# Altium PCB SM3320-BATT-EV.PcbDoc (part 1 of 2)
Units mm, origin at the board's own origin, x right, y up, seen from the top; angles counter-clockwise.
Board outline 204 x 81 mm, 2 copper layers (Top Layer, Bottom Layer), stack 1.662 mm thick; 170 components, 72 nets, 423 pads, 282 vias.
Unrouted connection lines stored in the file: 70.
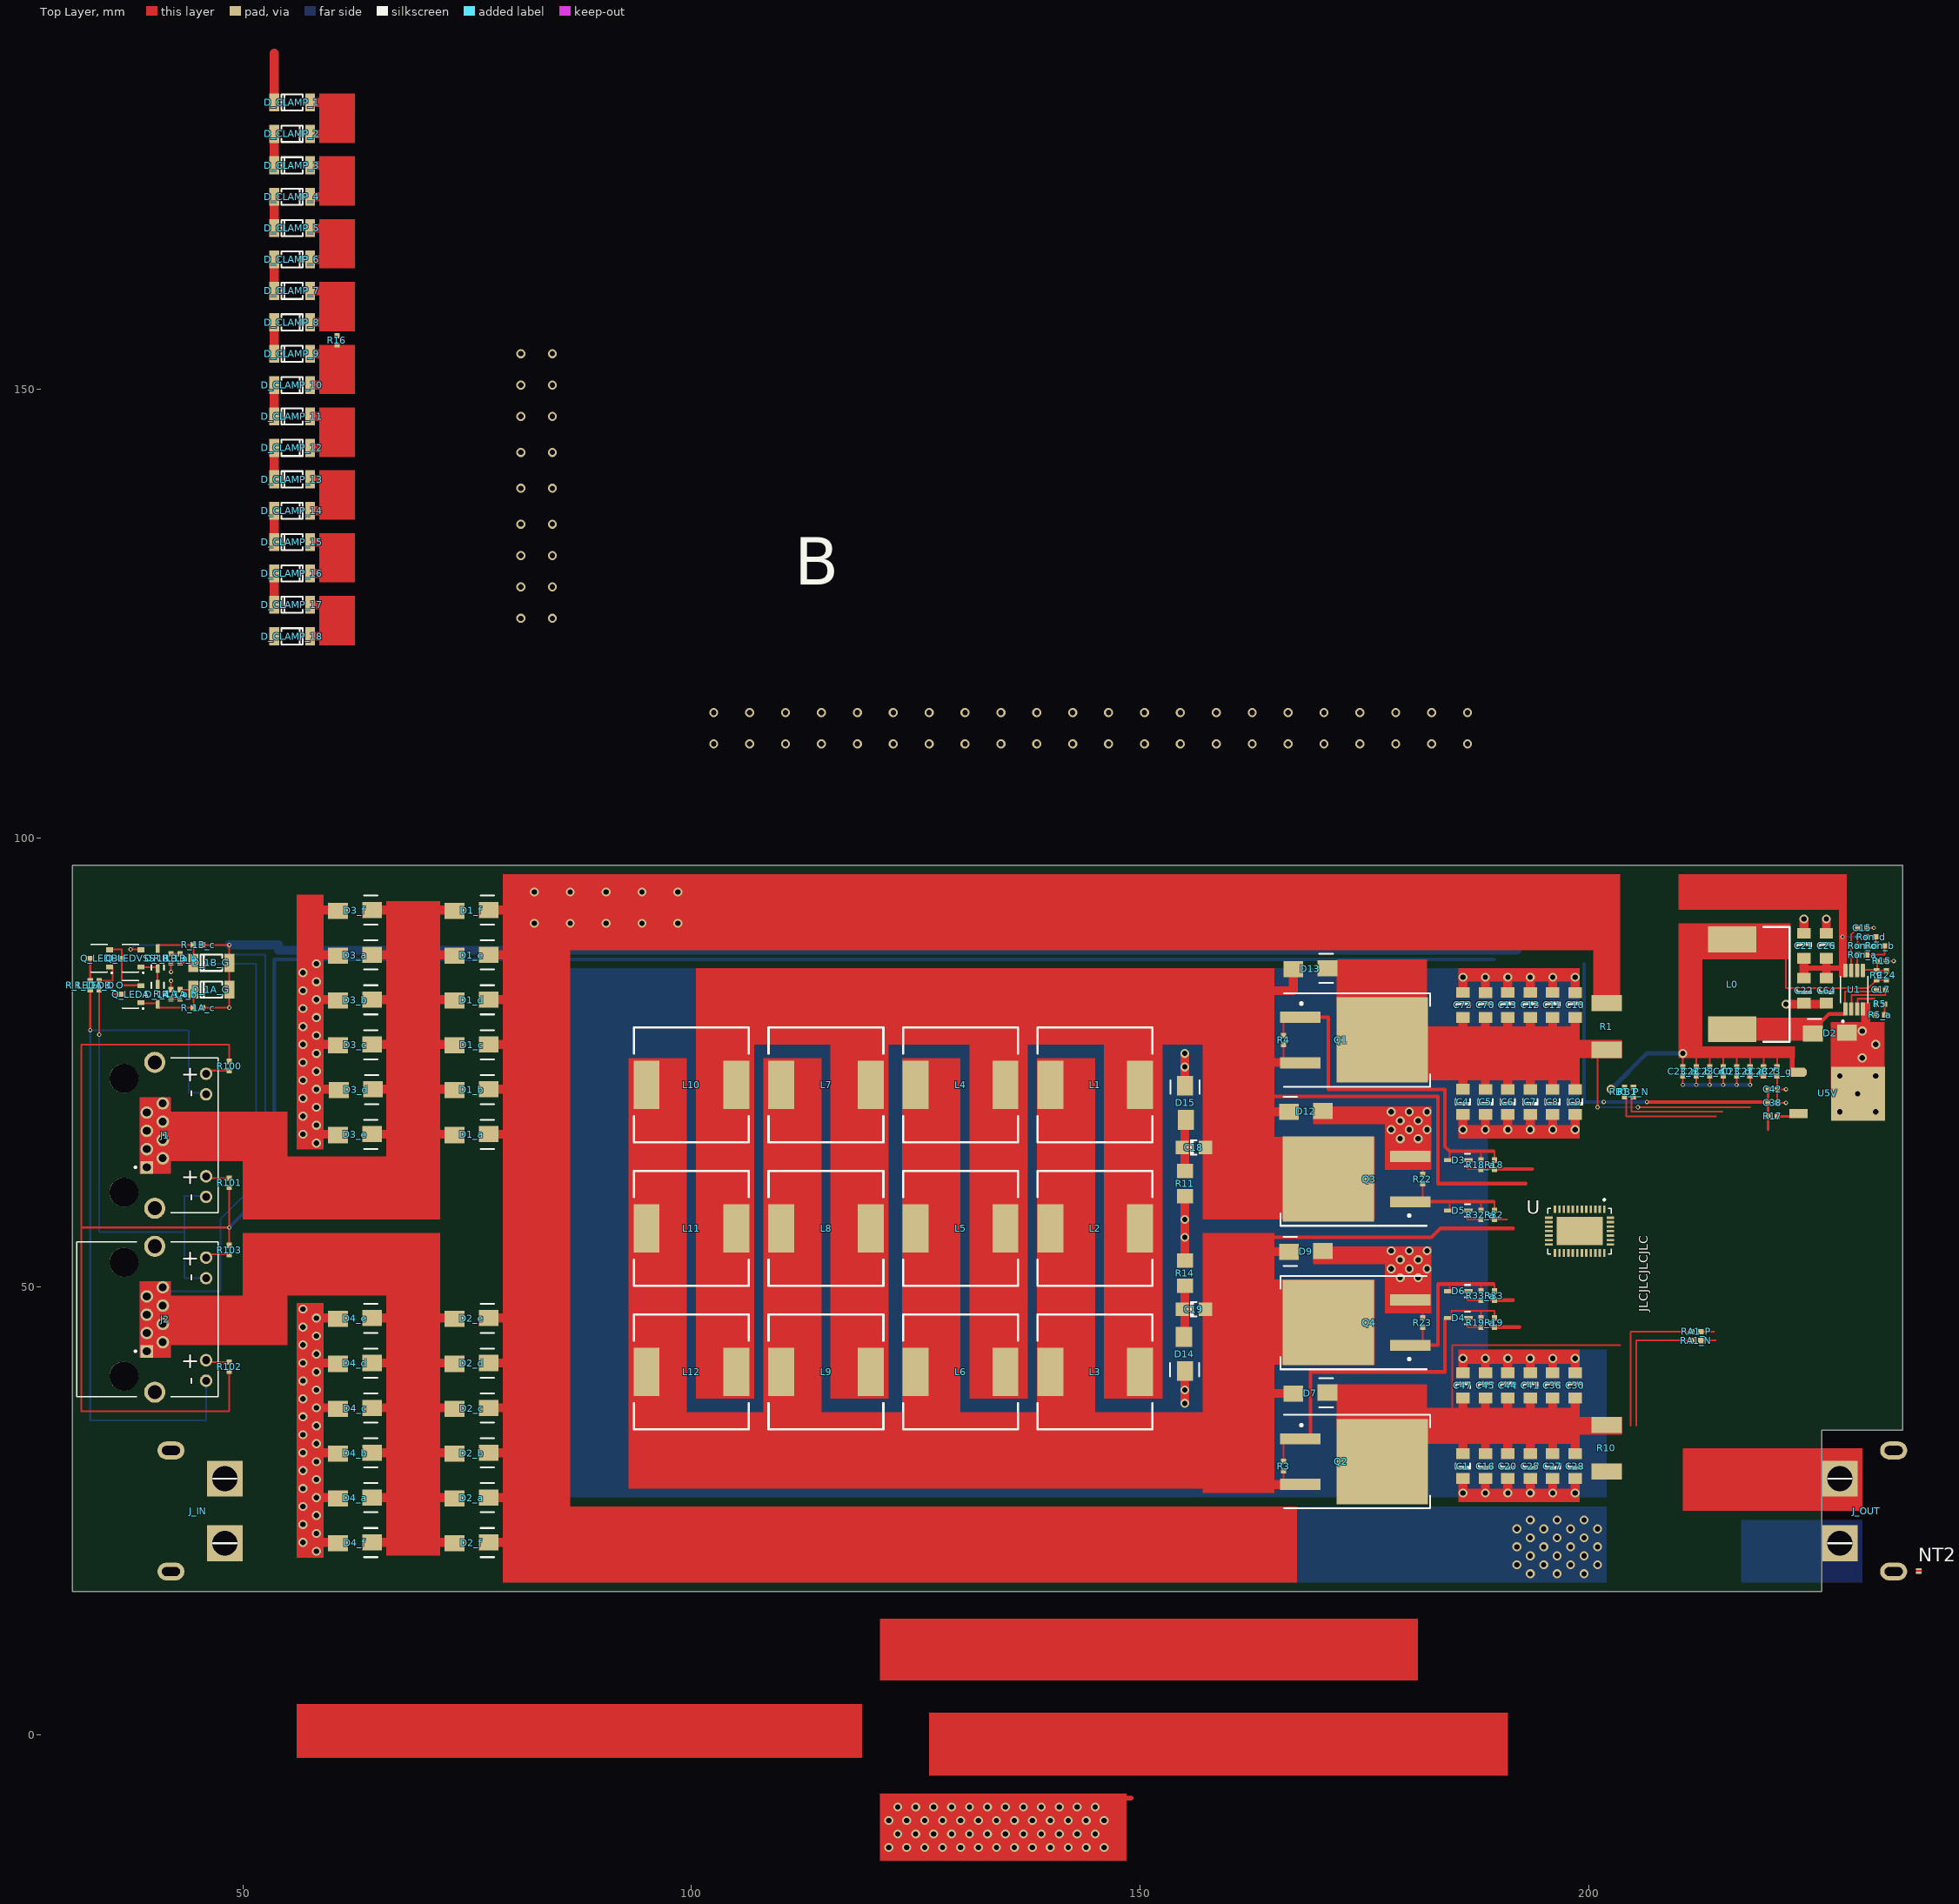
[diagram p0: Top Layer view]
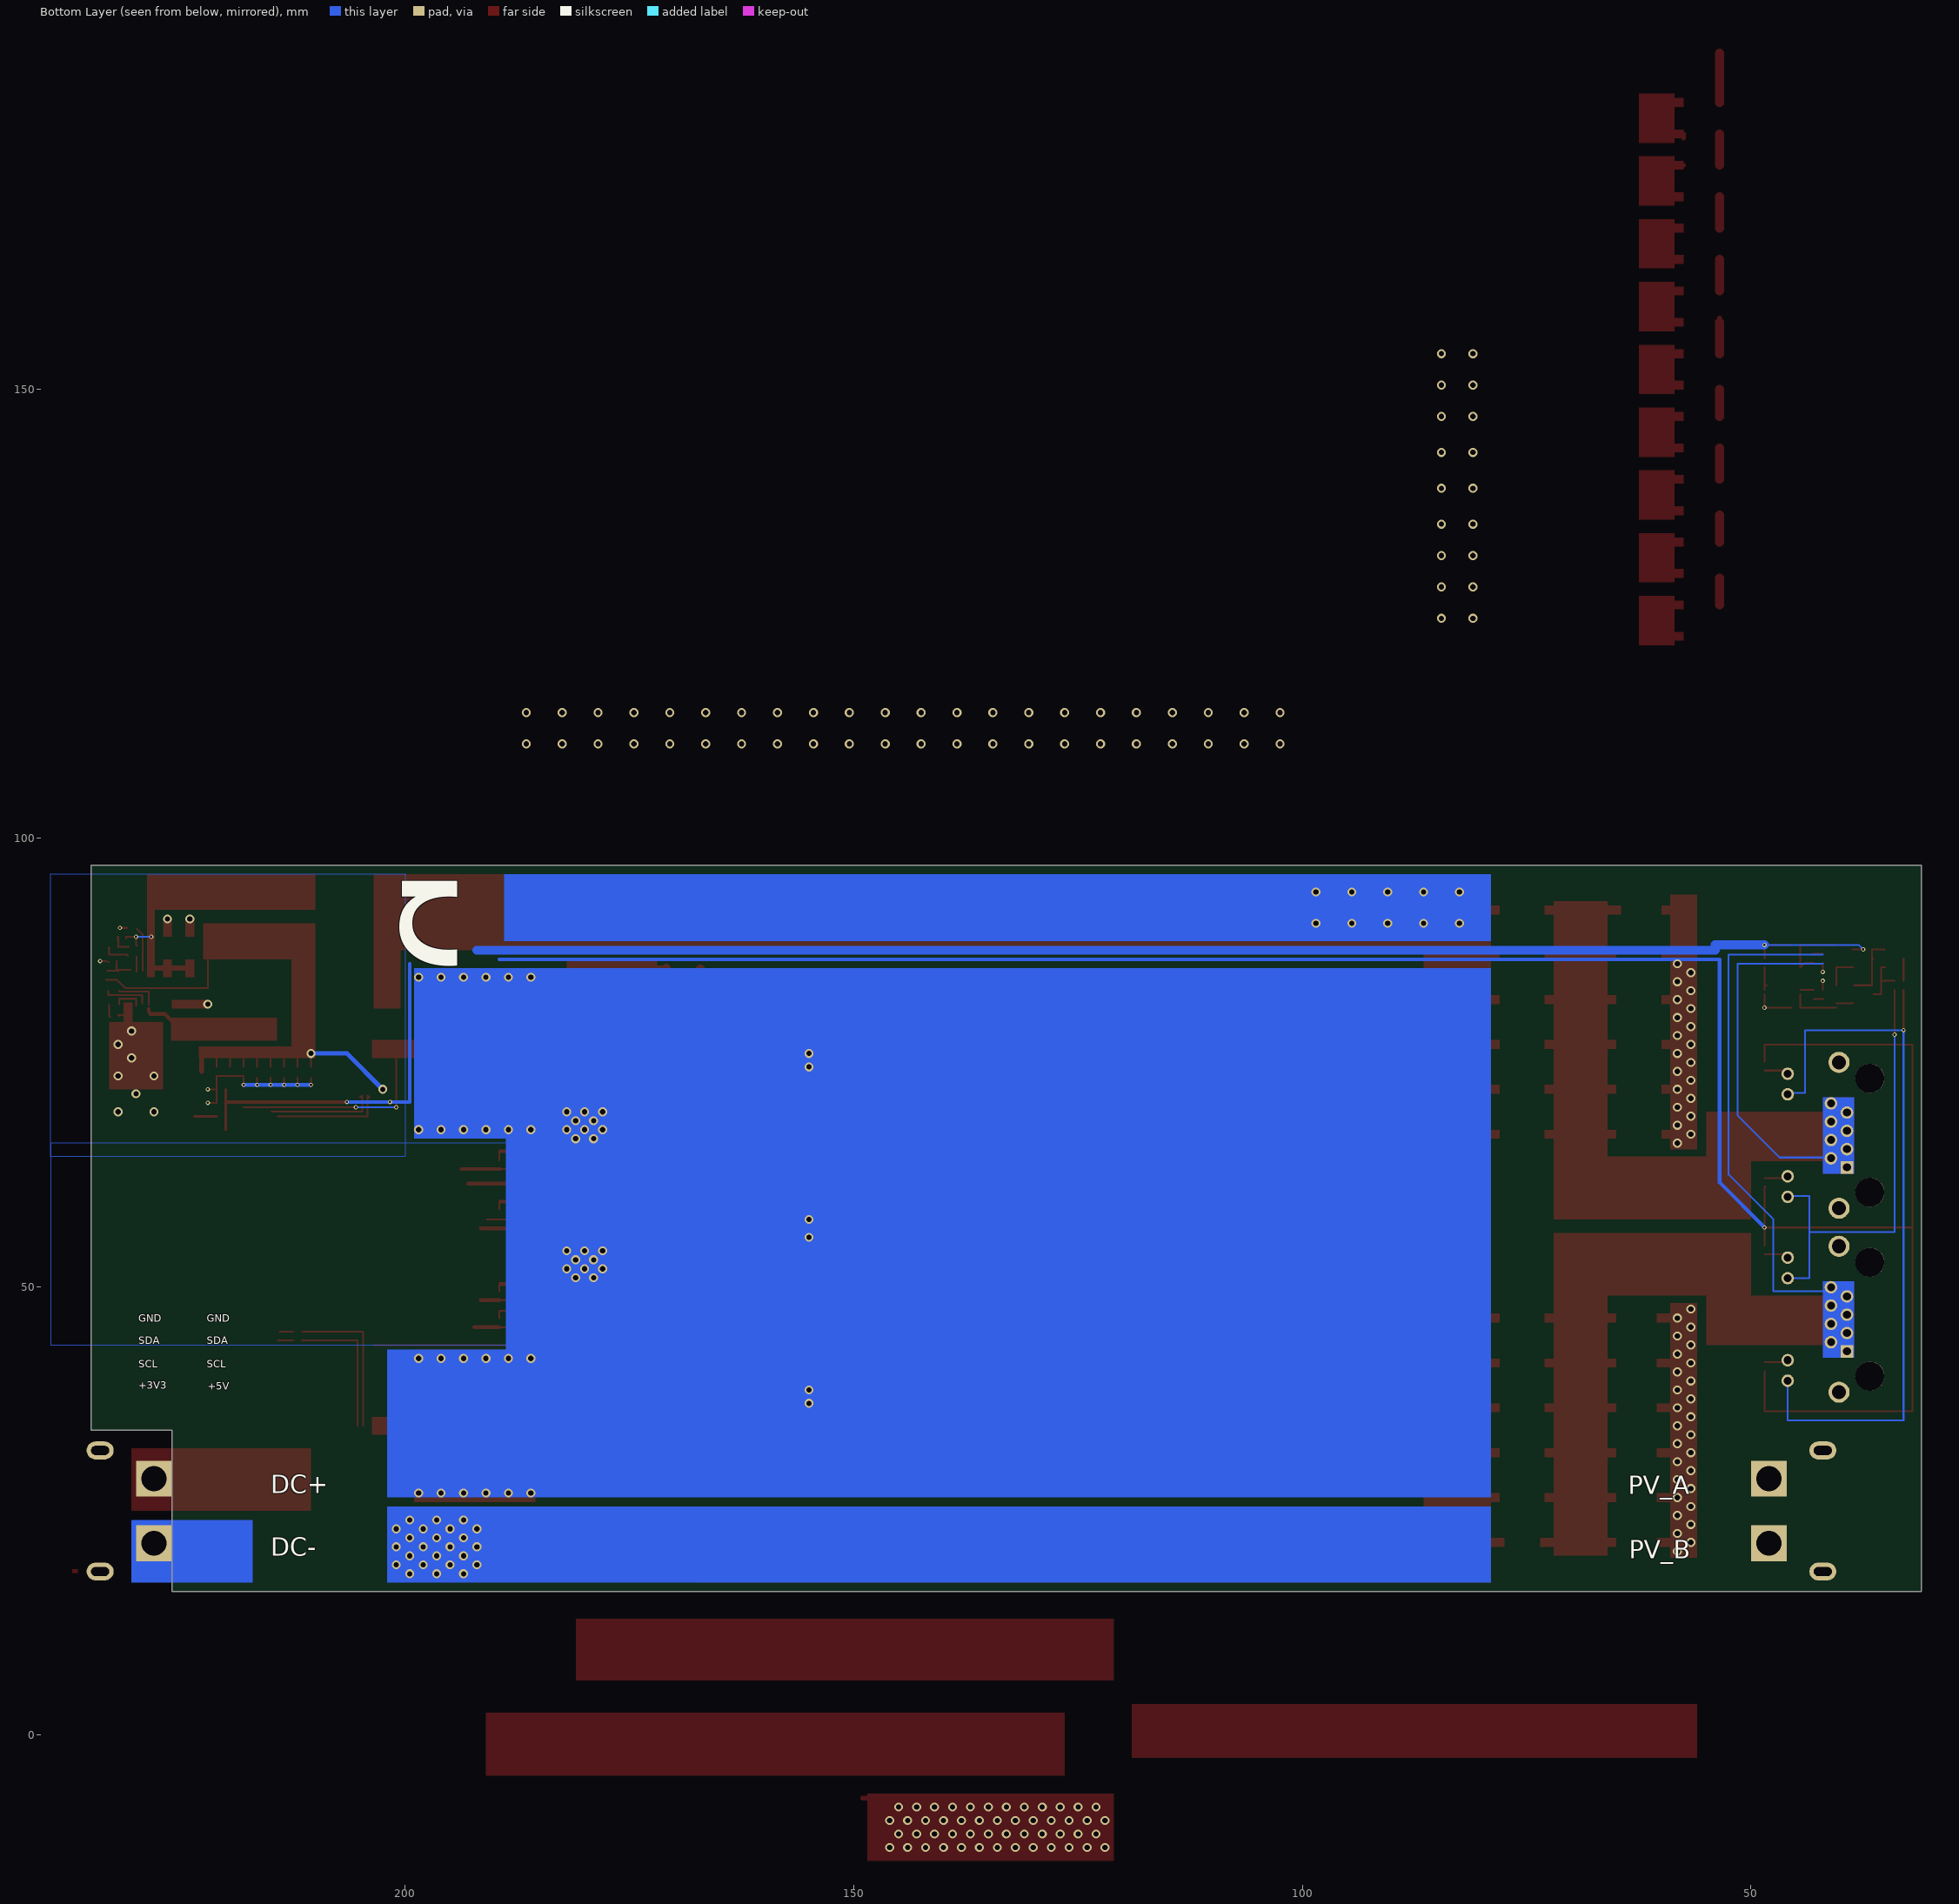
[diagram p1: Bottom Layer view, seen from below]

## Layer stack, top to bottom
Top Solder: solder mask 0.0102, Solder Resist, Dk 3.5
Top Layer: signal copper 0.0711
Dielectric1: core 1.52, FR-4, Dk 4.8
Bottom Layer: signal copper 0.0711
Bottom Solder: solder mask 0.0102, Solder Resist, Dk 3.5

## Board outline
31,16 31,97 235,97.001 235,34 226,34 226,16

## Design rules (kind name [scope] priority, off if disabled: settings)
Clearance Clearance_12 [(IsRegion AND InNet('VIN_D') AND OnLayer('MidLayer4'))] p1: gap=0.61 ignorepadtopadclearanceinfootprint=FALSE except(0: Arc-Hole Track-Hole SMDPad-Hole THPad-Hole Via-Hole Fill-Hole Poly-Hole Region-Hole Text-Hole)
Clearance Clearance_11 [(IsRegion AND InNet('GND') AND OnLayer('MidLayer3'))] p2 off: gap=0.61 ignorepadtopadclearanceinfootprint=FALSE except(0: Arc-Hole Track-Hole SMDPad-Hole THPad-Hole Via-Hole Fill-Hole Poly-Hole Region-Hole Text-Hole)
Clearance Clearance_10 [InNamedPolygon('Top Layer-No Net 15')] p3: gap=0.635 ignorepadtopadclearanceinfootprint=FALSE except(0: Arc-Hole Track-Hole SMDPad-Hole THPad-Hole Via-Hole Fill-Hole Poly-Hole Region-Hole Text-Hole)
Clearance Clearance_8 [InNamedPolygon('Bottom Layer-No Net 5')] p4: gap=0.635 ignorepadtopadclearanceinfootprint=FALSE except(0: Arc-Hole Track-Hole SMDPad-Hole THPad-Hole Via-Hole Fill-Hole Poly-Hole Region-Hole Text-Hole)
Clearance Clearance_6 [InNamedPolygon('MidLayer1-No Net 5')] p5: gap=0.406 ignorepadtopadclearanceinfootprint=FALSE except(0: Arc-Hole Track-Hole SMDPad-Hole THPad-Hole Via-Hole Fill-Hole Poly-Hole Region-Hole Text-Hole)
Clearance Clearance_13 [InNamedPolygon('MidLayer3-No Net 5')] p6: gap=0.406 ignorepadtopadclearanceinfootprint=FALSE except(0: Arc-Hole Track-Hole SMDPad-Hole THPad-Hole Via-Hole Fill-Hole Poly-Hole Region-Hole Text-Hole)
Clearance Clearance_5 [InNamedPolygon('Top Layer-No Net 16')] p7: gap=0.635 ignorepadtopadclearanceinfootprint=FALSE except(0: Arc-Hole Track-Hole SMDPad-Hole THPad-Hole Via-Hole Fill-Hole Poly-Hole Region-Hole Text-Hole)
Clearance Clearance_3 [InNamedPolygon('Top Layer-No Net 17')] p8: gap=0.635 ignorepadtopadclearanceinfootprint=FALSE except(0: Arc-Hole Track-Hole SMDPad-Hole THPad-Hole Via-Hole Fill-Hole Poly-Hole Region-Hole Text-Hole)
Clearance Clearance_1 [InNamedPolygon('Bottom Layer-No Net 5')] p9: gap=0.635 ignorepadtopadclearanceinfootprint=FALSE except(0: Arc-Hole Track-Hole SMDPad-Hole THPad-Hole Via-Hole Fill-Hole Poly-Hole Region-Hole Text-Hole)
Clearance [InNamedPolygon('MidLayer1-No Net 5')] p10: gap=1.016 ignorepadtopadclearanceinfootprint=FALSE except(0: Arc-Hole Track-Hole SMDPad-Hole THPad-Hole Via-Hole Fill-Hole Poly-Hole Region-Hole Text-Hole)
Clearance HV_NETS [InNetClass('HV_NETS')] p11: gap=0.61 ignorepadtopadclearanceinfootprint=FALSE except(0: Arc-Hole Track-Hole SMDPad-Hole THPad-Hole Via-Hole Fill-Hole Poly-Hole Region-Hole Text-Hole)
Clearance Clearance_2 [All] p12: gap=0.254 ignorepadtopadclearanceinfootprint=FALSE except(0: Arc-Hole Track-Hole SMDPad-Hole THPad-Hole Via-Hole Fill-Hole Poly-Hole Region-Hole Text-Hole)
Clearance Clearance_9 [(InComponent('P1')) vs (OnLayer('Keep-Out Layer'))] p13: gap=0 ignorepadtopadclearanceinfootprint=FALSE
Clearance Clearance_7 [InNamedPolygon('Top Layer-No Net 4')] p14: gap=0.241 ignorepadtopadclearanceinfootprint=FALSE except(0: Arc-Hole Track-Hole SMDPad-Hole THPad-Hole Via-Hole Fill-Hole Poly-Hole Region-Hole Text-Hole)
Clearance Clearance_4 [InNamedPolygon('MidLayer1-No Net')] p15: gap=0.241 ignorepadtopadclearanceinfootprint=FALSE except(0: Arc-Hole Track-Hole SMDPad-Hole THPad-Hole Via-Hole Fill-Hole Poly-Hole Region-Hole Text-Hole)
ComponentClearance [All] p1: gap=0.635 collisioncheckmode=3 verticalgap=0.254 showdistances=FALSE
ComponentClearance ComponentClearance_1 [All] p2: gap=0.254 collisioncheckmode=3 verticalgap=0.254 showdistances=FALSE
DiffPairsRouting DiffPairsRouting_1 [All] p2: maxlimit=0.254 minlimit=0.254 mostfreqgap=0.254 toplayer_minwidth=0.381 toplayer_maxwidth=0.381 toplayer_prefwidth=0.381 bottomlayer_minwidth=0.381 bottomlayer_maxwidth=0.381 bottomlayer_prefwidth=0.381 maxuncoupledlength=12.7
FabricationTestPointUsage TestPointUsage [All] p1: valid=0 allowmultiple=FALSE
FabricationTestPointUsage TestPointUsage_1 [All] p2: valid=0 allowmultiple=FALSE
FabricationTestpoint Testpoint [All] p1: side=3 testpointundercomponent=TRUE minsize=1.016 maxsize=2.54 preferedsize=1.524 minholesize=0 maxholesize=1.016 preferedholesize=0.813 testpointgrid=0.025 allowsidetop=TRUE allowsidebottom=TRUE usegrid=TRUE gridtolerance=0
FabricationTestpoint Testpoint_1 [All] p2: side=3 testpointundercomponent=TRUE minsize=1.016 maxsize=2.54 preferedsize=1.524 minholesize=0 maxholesize=1.016 preferedholesize=0.813 testpointgrid=0.025 allowsidetop=TRUE allowsidebottom=TRUE usegrid=TRUE gridtolerance=0
FanoutControl Fanout_LCC [IsLCC] p1: bgadir=Out bgaviamode=Centered fanoutstyle=Auto fanoutdirection=Alternating viagrid=0.025 // Fanout_LCC (Default Rule)
FanoutControl Fanout_BGA [IsBGA] p2: bgadir=Out bgaviamode=Centered fanoutstyle=Auto fanoutdirection=Alternating viagrid=0.025 // Fanout_BGA (Default Rule)
FanoutControl Fanout_Default [All] p4: bgadir=Out bgaviamode=Centered fanoutstyle=Auto fanoutdirection=Alternating viagrid=0.025 // Fanout_Default (Default Rule)
FanoutControl Fanout_Small [(CompPinCount < 5)] p5: bgadir=Out bgaviamode=Centered fanoutstyle=Auto fanoutdirection=OutThenIn viagrid=0.025 // Fanout_Small (Default Rule)
FanoutControl Fanout_BGA_1 [IsBGA] p6: bgadir=Out bgaviamode=Centered fanoutstyle=Auto fanoutdirection=Alternating viagrid=0.025 // Fanout_BGA (Default Rule)
FanoutControl Fanout_LCC_1 [IsLCC] p7: bgadir=Out bgaviamode=Centered fanoutstyle=Auto fanoutdirection=Alternating viagrid=0.025 // Fanout_LCC (Default Rule)
FanoutControl Fanout_SOIC_1 [IsSOIC] p8: bgadir=Out bgaviamode=Centered fanoutstyle=Auto fanoutdirection=Alternating viagrid=0.025 // Fanout_SOIC (Default Rule)
FanoutControl Fanout_Small_1 [(CompPinCount < 5)] p9: bgadir=Out bgaviamode=Centered fanoutstyle=Auto fanoutdirection=OutThenIn viagrid=0.025 // Fanout_Small (Default Rule)
FanoutControl Fanout_Default_1 [All] p10: bgadir=Out bgaviamode=Centered fanoutstyle=Auto fanoutdirection=Alternating viagrid=0.025 // Fanout_Default (Default Rule)
Height Height_1 [All] p2: minheight=0 maxheight=25.4 prefheight=12.7
HoleSize [All] p1: absolutevalues=TRUE maxlimit=6.375 minlimit=0.198 maxpercent=80.000 minpercent=20.000
HoleSize HoleSize_1 [All] p2: absolutevalues=TRUE maxlimit=2.54 minlimit=0.025 maxpercent=80.000 minpercent=20.000
LayerPairs LayerPairs_1 [All] p2: enforce=TRUE
MinimumAnnularRing [All] p1: minimumring=0.203
PasteMaskExpansion PasteMaskExpansion_1 [All] p2: expansion=0
PlaneClearance PlaneClearance_1 [All] p2: clearance=0.508
PlaneConnect [All] p1: planeconnectstyle=Relief reliefexpansion=0.254 reliefentries=4 reliefconductorwidth=0.203 reliefairgap=0.254
PolygonConnect PolygonConnect_12 [All vs IsNamedPolygon('Top Layer-No Net 4') Or  IsNamedPolygon('Top Layer-GND') Or  IsNamedPolygon('Vout') Or  IsNamedPolygon('Top Layer-No Net 4') Or  IsNamedPolygon('Top Layer-No Net 4') Or  IsNamedPolygon('Top Layer-No Net 4') Or  IsNamedPolygon('Top Layer-No Net 4') Or  IsNamedPolygon('Top Layer-No Net 4') Or  IsNamedPolygon('Top Layer-No Net 4') Or  IsNamedPolygon('Top Layer-No Net 4') Or  IsNamedPolygon('Top Layer-No Net 4') Or  IsNamedPolygon('Top Layer-No Net 4') Or  IsNamedPolygon('Top Layer-No Net 4') Or  IsNamedPolygon('Top Layer-No Net 4') Or  IsNamedPolygon('MidLayer1-No Net') Or  IsNamedPolygon('Top Layer-No Net 4') Or  IsNamedPolygon('Top Layer-No Net 4') Or  IsNamedPolygon('Top Layer-No Net 4') Or  IsNamedPolygon('Top Layer-No Net 4') Or  IsNamedPolygon('Top Layer-No Net 4') Or  IsNamedPolygon('Top Layer-No Net 3') Or  IsNamedPolygon('Top Layer-No Net 4') Or  IsNamedPolygon('Top Layer-No Net 4') Or  IsNamedPolygon('Top Layer-No Net 4') Or  IsNamedPolygon('Top Layer-No Net 4') Or  IsNamedPolygon('Top Layer-No Net 3') Or  IsNamedPolygon('Top Layer-No Net 4') Or  IsNamedPolygon('Top Layer-No Net 4') Or  IsNamedPolygon('Top Layer-No Net 1') Or  IsNamedPolygon('Top Layer-No Net 4') Or  IsNamedPolygon('Top Layer-No Net 4') Or  IsNamedPolygon('Top Layer-No Net 4') Or  IsNamedPolygon('Top Layer-No Net 2') Or  IsNamedPolygon('Top Layer-No Net 4') Or  IsNamedPolygon('Top Layer-No Net 4') Or  IsNamedPolygon('Top Layer-No Net 4') Or  IsNamedPolygon('Top Layer-No Net 4') Or  IsNamedPolygon('Top Layer-No Net') Or  IsNamedPolygon('Top Layer-No Net 4')] p1: connectstyle=Direct reliefconductorwidth=0.254 reliefentries=4 polygonreliefangle="90 Angle" airgapwidth=0.254
PolygonConnect PolygonConnect_11 [All vs IsNamedPolygon('Vout') Or  IsNamedPolygon('MidLayer1-No Net')] p2: connectstyle=Direct reliefconductorwidth=0.254 reliefentries=4 polygonreliefangle="90 Angle" airgapwidth=0.254
PolygonConnect PolygonConnect_10 [All vs IsNamedPolygon('Top Layer-No Net 4')] p3: connectstyle=Direct reliefconductorwidth=0.254 reliefentries=4 polygonreliefangle="90 Angle" airgapwidth=0.254
PolygonConnect PolygonConnect_9 [All vs IsNamedPolygon('Top Layer-No Net 4')] p4: connectstyle=Direct reliefconductorwidth=0.254 reliefentries=4 polygonreliefangle="90 Angle" airgapwidth=0.254
PolygonConnect PolygonConnect_8 [All vs IsNamedPolygon('Top Layer-No Net') Or  IsNamedPolygon('MidLayer1-No Net') Or  IsNamedPolygon('Top Layer-No Net 4')] p5: connectstyle=Direct reliefconductorwidth=0.254 reliefentries=4 polygonreliefangle="90 Angle" airgapwidth=0.254
PolygonConnect PolygonConnect_7 [All vs IsNamedPolygon('Top Layer-No Net') Or  IsNamedPolygon('Top Layer-No Net 3') Or  IsNamedPolygon('MidLayer1-No Net')] p6: connectstyle=Direct reliefconductorwidth=0.254 reliefentries=4 polygonreliefangle="90 Angle" airgapwidth=0.254
PolygonConnect PolygonConnect_6 [All vs IsNamedPolygon('Top Layer-No Net 2') Or  IsNamedPolygon('MidLayer1-No Net') Or  IsNamedPolygon('Top Layer-No Net')] p7: connectstyle=Direct reliefconductorwidth=0.254 reliefentries=4 polygonreliefangle="90 Angle" airgapwidth=0.254
PolygonConnect PolygonConnect_5 [All vs IsNamedPolygon('Top Layer-No Net') Or  IsNamedPolygon('Top Layer-No Net 1') Or  IsNamedPolygon('MidLayer1-No Net')] p8: connectstyle=Direct reliefconductorwidth=0.254 reliefentries=4 polygonreliefangle="90 Angle" airgapwidth=0.254
PolygonConnect PolygonConnect_4 [All vs IsNamedPolygon('MidLayer1-No Net') Or  IsNamedPolygon('Top Layer-No Net')] p9: connectstyle=Direct reliefconductorwidth=0.254 reliefentries=4 polygonreliefangle="90 Angle" airgapwidth=0.254
PolygonConnect PolygonConnect_3 [All vs IsNamedPolygon('Top Layer-No Net') Or  IsNamedPolygon('Top Layer-GND')] p10: connectstyle=Direct reliefconductorwidth=0.254 reliefentries=4 polygonreliefangle="90 Angle" airgapwidth=0.254
PolygonConnect PolygonConnect_2 [All vs IsNamedPolygon('Top Layer-No Net')] p11: connectstyle=Direct reliefconductorwidth=0.254 reliefentries=4 polygonreliefangle="90 Angle" airgapwidth=0.254
PolygonConnect [All] p12: connectstyle=Direct reliefconductorwidth=0.203 reliefentries=4 polygonreliefangle="90 Angle" airgapwidth=0.254
PolygonConnect PolygonConnect_1 [All] p13: connectstyle=Direct reliefconductorwidth=0.254 reliefentries=4 polygonreliefangle="90 Angle" airgapwidth=0.254
RoutingPriority RoutingPriority_1 [All] p2: routingpriority=0
RoutingTopology RoutingTopology_1 [All] p2: topology=Shortest
RoutingVias [All] p1: holewidth=0.406 width=0.813 viastyle="Through Hole" minholewidth=0.254 minwidth=0.635 maxholewidth=0.508 maxwidth=1.016
ShortCircuit ShortCircuit_1 [All] p2: allowed=FALSE
SilkToSolderMaskClearance SilkscreenOverComponentPads [IsPad] p1: minsilkscreentomaskgap=0.127 clearancetoexposedcopper=TRUE
SolderMaskExpansion SolderMaskExpansion_2 [(IsVia And (HoleDiameter  < 15))] p1: expansion=-0.356
SolderMaskExpansion [All] p2: expansion=0.051
SolderMaskExpansion SolderMaskExpansion_1 [All] p3: expansion=0.051
UnRoutedNet UnRoutedNet_1 [All] p2:
Width [All] p1: maxlimit=2.54 minlimit=0.152 preferedwidth=0.254
20 further rules are at their usual default settings.

## Components (designator, comment, footprint, x,y, rotation, side; value= is the part's Value field where it differs from the comment)
C1 "1206B105K101NT" C_1206#1 186.003,30.005 r90 top value=1uF
C4 "1206B105K101NT" C_1206#1 186.003,70.605 r90 top value=1uF
C5 "1206B105K101NT" C_1206#1 188.5,70.6 r90 top value=1uF
C6 "1206B105K101NT" C_1206#1 191,70.6 r90 top value=1uF
C7 "1206B105K101NT" C_1206#1 193.5,70.6 r90 top value=1uF
C8 "1206B105K101NT" C_1206#1 196,70.6 r90 top value=1uF
C9 "1206B105K101NT" C_1206#1 198.5,70.6 r90 top value=1uF
C10 "1206B105K101NT" C_1206#1 198.497,81.395 r270 top value=1uF
C11 "1206B105K101NT" C_1206#1 196,81.4 r270 top value=1uF
C12 "1206B105K101NT" C_1206#1 193.5,81.4 r270 top value=1uF
C13 "1206B105K101NT" C_1206#1 191,81.4 r270 top value=1uF
C15 "CL05A105KA5NQNC" C_0402 230.5,90 r0 top value=1uF
C16 "1206B105K101NT" C_1206#1 188.503,30.005 r90 top value=1uF
C17 "CL05B103KB5NNNC" C_0402 232.6,83.1 r180 top value=10nF
C18 "1206B102K202NT" C_1206#2 156,65.5 r0 top value=1nF
C19 "1206B102K202NT" C_1206#2 156,47.5 r0 top value=1nF
C20 "1206B105K101NT" C_1206#1 191.003,30.005 r90 top value=1uF
C21 "1206B105K101NT" C_1206#1 224,88 r270 top value=1uF
C22 "1206B105K101NT" C_1206#1 224,83 r90 top value=1uF
C23_a "CL05A105KA5NQNC" C_0402 210.5,74 r270 top value=1uF
C23_b "CL05A105KA5NQNC" C_0402 212,74 r270 top value=1uF
C23_c "CL05A105KA5NQNC" C_0402 213.5,74 r270 top value=1uF
C23_d "CL05A105KA5NQNC" C_0402 216.5,74 r270 top value=1uF
C23_e "CL05A105KA5NQNC" C_0402 218,74 r270 top value=1uF
C23_f "CL05A105KA5NQNC" C_0402 219.5,74 r270 top value=1uF
C23_g "CL05A105KA5NQNC" C_0402 221,74 r270 top value=1uF
C24 "CL05B332KB5NNNC" C_0402 233.2,84.7 r270 top value=3.3nF
C25 "1206B105K101NT" C_1206#1 193.503,30.005 r90 top value=1uF
C26 "1206B105K101NT" C_1206#1 226.5,88 r270 top value=1uF
C27 "1206B105K101NT" C_1206#1 196.003,30.005 r90 top value=1uF
C28 "1206B105K101NT" C_1206#1 198.503,30.005 r90 top value=1uF
C30 "1206B105K101NT" C_1206#1 198.5,39 r270 top value=1uF
C36 "1206B105K101NT" C_1206#1 195.997,38.995 r270 top value=1uF
C38 "CL05A106MQ5NUNC" C_0402 220.5,70.5 r180 top value=10uF
C40 "CL05A105KA5NQNC" C_0402 215,74 r90 top value=1uF
C41 "1206B105K101NT" C_1206#1 193.497,38.995 r270 top value=1uF
C42 "CL05A106MQ5NUNC" C_0402 220.5,72 r180 top value=10uF
C44 "1206B105K101NT" C_1206#1 190.997,38.995 r270 top value=1uF
C45 "1206B105K101NT" C_1206#1 188.497,38.995 r270 top value=1uF
C47 "1206B105K101NT" C_1206#1 185.997,38.995 r270 top value=1uF
C64 "1206B105K101NT" C_1206#1 226.5,83 r90 top value=1uF
C70 "1206B105K101NT" C_1206#1 188.497,81.395 r270 top value=1uF
C72 "1206B105K101NT" C_1206#1 186,81.4 r270 top value=1uF
D1_a "SS210" DO-214AC 75.5,67 r180 top
D1_b "SS210" DO-214AC 75.5,72 r180 top
D1_c "SS210" DO-214AC 75.5,77 r180 top
D1_d "SS210" DO-214AC 75.5,82 r180 top
D1_e "SS210" DO-214AC 75.5,87 r180 top
D1_f "SS210" DO-214AC 75.5,92 r180 top
D2 "SS210" DO-214AC 226.9,78.2 r0 top
D2_a "SS210" DO-214AC 75.5,26.5 r180 top
D2_b "SS210" DO-214AC 75.5,31.5 r180 top
D2_c "SS210" DO-214AC 75.5,36.5 r180 top
D2_d "SS210" DO-214AC 75.5,41.5 r180 top
D2_e "SS210" DO-214AC 75.5,46.5 r180 top
D2_f "SS210" DO-214AC 75.5,21.5 r180 top
D3 "N4148WS" SOD-323 185.5,64.1 r180 top
D3_a "SS210" DO-214AC 62.5,87 r180 top
D3_b "SS210" DO-214AC 62.5,82 r180 top
D3_c "SS210" DO-214AC 62.5,77 r180 top
D3_d "SS210" DO-214AC 62.6,72 r180 top
D3_e "SS210" DO-214AC 62.5,67 r180 top
D3_f "SS210" DO-214AC 62.5,92 r180 top
D4 "N4148WS" SOD-323 185.5,46.5 r180 top
D4_a "SS210" DO-214AC 62.5,26.5 r180 top
D4_b "SS210" DO-214AC 62.5,31.5 r180 top
D4_c "SS210" DO-214AC 62.5,36.5 r180 top
D4_d "SS210" DO-214AC 62.5,41.5 r180 top
D4_e "SS210" DO-214AC 62.5,46.5 r180 top
D4_f "SS210" DO-214AC 62.5,21.5 r180 top
D5 "N4148WS" SOD-323 185.5,58.5 r180 top
D6 "N4148WS" SOD-323 185.5,49.5 r180 top
D7 "SS210" DO-214AC 169,38.2 r180 top
D9 "SS210" DO-214AC 168.5,53.9 r0 top
D12 "SS210" DO-214AC 168.5,69.5 r0 top
D13 "SS210" DO-214AC 169,85.5 r180 top
D14 "SS210" DO-214AC 155,42.5 r90 top
D15 "SS210" DO-214AC 155,70.5 r270 top
D_1A "N4148WS" SOD-323 40.5,82.6 r270 top
D_1A_G "ZMM5V6-M" DO-213AA 46.5,83.1 r0 top
D_1B "N4148WS" SOD-323 40.5,86.6 r90 top
D_1B_G "ZMM5V6-M" DO-213AA 46.5,86.1 r0 top
D_CLAMP_1 "ZMM5V6-M" DO-213AA 55.5,182 r0 top
D_CLAMP_2 "ZMM5V6-M" DO-213AA 55.5,178.5 r180 top
D_CLAMP_3 "ZMM5V6-M" DO-213AA 55.5,175 r0 top
D_CLAMP_4 "ZMM5V6-M" DO-213AA 55.5,171.5 r180 top
D_CLAMP_5 "ZMM5V6-M" DO-213AA 55.5,168 r0 top
D_CLAMP_6 "ZMM5V6-M" DO-213AA 55.5,164.5 r180 top
D_CLAMP_7 "ZMM5V6-M" DO-213AA 55.5,161 r0 top
D_CLAMP_8 "ZMM5V6-M" DO-213AA 55.5,157.5 r180 top
D_CLAMP_9 "ZMM5V6-M" DO-213AA 55.5,154 r0 top
D_CLAMP_10 "ZMM5V6-M" DO-213AA 55.5,150.5 r180 top
D_CLAMP_11 "ZMM5V6-M" DO-213AA 55.5,147 r0 top
D_CLAMP_12 "ZMM5V6-M" DO-213AA 55.5,143.5 r180 top
D_CLAMP_13 "ZMM5V6-M" DO-213AA 55.5,140 r0 top
D_CLAMP_14 "ZMM5V6-M" DO-213AA 55.5,136.5 r180 top
D_CLAMP_15 "ZMM5V6-M" DO-213AA 55.5,133 r0 top
D_CLAMP_16 "ZMM5V6-M" DO-213AA 55.5,129.5 r180 top
D_CLAMP_17 "ZMM5V6-M" DO-213AA 55.5,126 r0 top
D_CLAMP_18 "ZMM5V6-M" DO-213AA 55.5,122.5 r180 top
J1 "2-406549-1" TE_2-406549-1 39.305,63.297 r270 top
J2 "2-406549-1" TE_2-406549-1 39.305,42.797 r270 top
J_IN "XT60PW_M" XT60PW_M 48,25 r90 top
J_OUT "XT60PW_F" XT60PW_F 228,25 r270 top
L0 "SWRB1207S-221MT" SRR1260 216,83.7 r90 top value=220uH
L1 "SWRB1207S-221MT" SRR1260 145,72.5 r180 top value=220uH
L2 "SWRB1207S-221MT" SRR1260 145,56.5 r180 top value=220uH
L3 "SWRB1207S-221MT" SRR1260 145,40.5 r180 top value=220uH
L4 "SWRB1207S-221MT" SRR1260 130,72.5 r180 top value=220uH
L5 "SWRB1207S-221MT" SRR1260 130,56.5 r180 top value=220uH
L6 "SWRB1207S-221MT" SRR1260 130,40.5 r180 top value=220uH
L7 "SWRB1207S-221MT" SRR1260 115,72.5 r180 top value=220uH
L8 "SWRB1207S-221MT" SRR1260 115,56.5 r180 top value=220uH
L9 "SWRB1207S-221MT" SRR1260 115,40.5 r180 top value=220uH
L10 "SWRB1207S-221MT" SRR1260 100,72.5 r180 top value=220uH
L11 "SWRB1207S-221MT" SRR1260 100,56.5 r180 top value=220uH
L12 "SWRB1207S-221MT" SRR1260 100,40.5 r180 top value=220uH
NT2 "0" NET_TIE 236.803,18.305 r90 top
Q1 "IRF9540NSTRLPBF" TO-263-3 174.079,77.5 r0 top
Q2 "IRF9540NSTRLPBF" TO-263-3 174.079,30.5 r0 top
Q3 "IRF9540NSTRLPBF" TO-263-3 173.921,62 r180 top
Q4 "IRF9540NSTRLPBF" TO-263-3 173.921,46 r180 top
Q_LEDA "2N7002" TO-236AB 37.5,82.6 r180 top
Q_LEDB "2N7002" TO-236AB 34,86.6 r180 top
Q_LEDVSS "2N7002" TO-236AB 37.5,86.6 r180 top
R1 "1m" R_2512 202,79 r90 top
R3 "0402WGF1002TCE" R_0402 166,30 r270 top value=10k
R4 "0402WGF1002TCE" R_0402 166,77.5 r90 top value=10k
R5 "0402WGF3302TCE" R_0402 232.5,81.5 r180 top value=33k
R5_a "0402WGF1003TCE" R_0402 232.5,80.3 r0 top value=100k
R9 "0402WGF1002TCE" R_0402 232.1,84.7 r90 top value=10k
R10 "1m" R_2512 202,32 r270 top
R11 "1206W4F100JT5E" R_1206 155,61.5 r90 top value=10R
R14 "1206W4F100JT5E" R_1206 155,51.5 r270 top value=10R
R15 "0402WGF3301TCE" R_0402 232.7,86.3 r180 top value=3.3k
R16 "0402WGF0000TCE" R_0402 60.5,155.5 r90 top value=0R
R17 "0402WGF0000TCE" R_0402 220.5,69 r180 top value=0R
R18 "0402WGF100JTCE" R_0402 189.5,63.6 r90 top value=10R
R18_a "0402WGF100JTCE" R_0402 188,63.6 r90 top value=10R
R19 "0402WGF100JTCE" R_0402 189.5,46 r270 top value=10R
R19_a "0402WGF100JTCE" R_0402 188,46 r270 top value=10R
R22 "0402WGF1002TCE" R_0402 181.5,62 r270 top value=10k
R23 "0402WGF1002TCE" R_0402 181.5,46 r90 top value=10k
R32 "0402WGF100JTCE" R_0402 189.5,58 r90 top value=10R
R32_a "0402WGF100JTCE" R_0402 188,58 r90 top value=10R
R33 "0402WGF100JTCE" R_0402 189.5,49.008 r270 top value=10R
R33_a "0402WGF100JTCE" R_0402 188,49.008 r270 top value=10R
R100 "0402WGF1001TCE" R_0402 48.5,74.6 r270 top value=1k
R101 "0402WGF1001TCE" R_0402 48.5,61.6 r90 top value=1k
R102 "0402WGF1001TCE" R_0402 48.5,41.1 r90 top value=1k
R103 "0402WGF1001TCE" R_0402 48.5,54.1 r270 top value=1k
R_1A_a "0402WGF4702TCE" R_0402 42,82.608 r270 top value=47k
R_1A_b "0402WGF4702TCE" R_0402 43,82.6 r90 top value=47k
R_1A_c "0402WGF1003TCE" R_0402 45,81.1 r180 top value=100k
R_1B_a "0402WGF4702TCE" R_0402 42,86.6 r90 top value=47k
R_1B_b "0402WGF4702TCE" R_0402 43,86.6 r270 top value=47k
R_1B_c "0402WGF1003TCE" R_0402 45,88.1 r180 top value=100k
R_LEDA_O "0402WGF0000TCE" R_0402 33,83.6 r270 top value=0R
R_LEDB_O "0402WGF0000TCE" R_0402 34,83.6 r270 top value=0R
RA1_N "0402WGF0000TCE" R_0402 212,44 r0 top value=0R
RA1_P "0402WGF0000TCE" R_0402 212,45 r0 top value=0R
RB1_N "0402WGF0000TCE" R_0402 205,71.7 r270 top value=0R
RB1_P "0402WGF0000TCE" R_0402 204,71.7 r270 top value=0R
Ron_a "0402WGF1003TCE" R_0402 230.5,87 r180 top value=100k
Ron_b "0402WGF1003TCE" R_0402 232.5,88 r180 top value=100k
Ron_c "0402WGF1003TCE" R_0402 230.5,88 r0 top value=100k
Ron_d "0402WGF1003TCE" R_0402 231.5,89 r0 top value=100k
U "LT8705IUHF#TRPBF" QFN-39-P0.5MM 199,56.2 r270 top
U1 "LM5008MMX/NOPB" SOP65P490X110-8N 229.6,83.1 r90 top
U5V "L78M05ABDT-TR" TO-252AA 230.05,71.5 r0 top

## Footprints (in the part's own frame and the unit in brackets; to place one, negate y for a bottom-side part, rotate by r counter-clockwise, add the part's x,y. Pads: shape width x height; smd on the part's side, far side on the other; paste and mask are expansions set on the pad)
C_0402 [mm] "Chip Capacitor; Body 1.0 x 0.5 mm (LxW typ)"
  rect 0.6x0.6 smd: 1(-0.508,0) 2(0.508,0)
  body extent -0.5,-0.3 0.5,0.3, height 0.2
C_1206#1 [mm] "Chip Capacitor; Body 3.2 x 1.6 mm (LxW typ)"
  rect 1.2x1.5 smd: 1(-1.395,0) 2(1.395,0)
  silkscreen extent -0.3,-0.8 0.3,0.8, body extent -1.6,-0.8 1.6,0.8, height 1
C_1206#2 [mm] "Chip Capacitor; Body 3.2 x 1.6 mm (LxW typ)"
  rect 1.5x1.5 smd: 1(-1.295,0) 2(1.295,0)
  silkscreen extent -0.3,-0.8 0.3,0.8, body extent -1.6,-0.8 1.6,0.8, height 1
DO-213AA [mm] "2 Leads"
  rect 1.1x2 smd: 1(-2,0) 2(2,0)
  silkscreen extent -1.2,-0.9 1.2,0.9, body extent -1.85,-0.8 1.85,0.8, height 1.61
DO-214AC [mm] "SMA Diode"
  rect 2.2x1.8 smd: 1(-1.9,0) 2(1.9,0.1)
  silkscreen extent -2.5,-1.6 -1,1.65, body extent -2.8,-1.48 2.8,1.47, height 2.9
NET_TIE [mm] "Body 1.0 x 0.5 mm (LxW typ)"
  rect 0.2x0.6 smd: 1(-0.2,0)
  rect 0.2x0.6 smd mask+0.102: 2(0.2,0)
  Top Layer region: -0.2,-0.3 0.2,-0.3 0.2,0.3 -0.2,0.3
QFN-39-P0.5MM [mm]
  rrect25% 0.86x0.27 smd: 1(-2.435,2.75) 2(-2.435,2.25) 3(-2.435,1.75) 4(-2.435,1.25) 5(-2.435,0.75) 6(-2.435,0.25) 7(-2.435,-0.25) 8(-2.435,-0.75) 9(-2.435,-1.25) 10(-2.435,-1.75) 11(-2.435,-2.25) 12(-2.435,-2.75) 20(2.435,-2.75) 21(2.435,-2.25) 22(2.435,-1.75) 23(2.435,-1.25) 24(2.435,-0.75) 25(2.435,-0.25) 26(2.435,0.25) 27(2.435,0.75) 28(2.435,1.25) 29(2.435,1.75) 30(2.435,2.25) 31(2.435,2.75)
  rrect25% 0.27x0.86 smd: 13(-1.5,-3.435) 14(-1,-3.435) 15(-0.5,-3.435) 16(0,-3.435) 17(0.5,-3.435) 18(1,-3.435) 19(1.5,-3.435) 32(1.5,3.435) 33(1,3.435) 34(0.5,3.435) 35(0,3.435) 36(-0.5,3.435) 37(-1,3.435) 38(-1.5,3.435)
  rect 3.15x5.15 smd paste-4: 39(0,0)
  silkscreen extent -3.59,-3.55 2.55,3.55
R_0402 [mm] "Body 1.0 x 0.5 mm (LxW typ)"
  rect 0.6x0.6 smd: 1(-0.508,0) 2(0.508,0)
  body extent -0.5,-0.25 0.5,0.25, height 0.35
R_1206 [mm] "Body 3.2 x 1.6 mm (LxW typ)"
  rect 1.6x1.8 smd: 1(-1.4,0) 2(1.4,0)
  body extent -1.91,-0.76 1.91,0.76, height 1
R_2512 [mm] "VISHAY SHUNT RESISTOR"
  rect 1.8x3.4 smd: 1(-2.6,0) 2(2.6,0)
  body extent -3.17,-1.57 3.17,1.6, height 1.22
SOD-323 [mm] "SOD-323/SC-76; 2 Leads; Body 1.7 x 1.3 mm, (LxW)"
  rect 1x0.45 smd: 1(-1.1,0) 2(1.1,0)
  silkscreen extent -1.3,-0.7 -0.7,0.7, body extent -1.43,-0.74 1.43,0.76, height 1.12
SOP65P490X110-8N [mm]
  rrect25% 1.47x0.48 smd: 1(-2.15,0.975) 2(-2.15,0.325) 3(-2.15,-0.325) 4(-2.15,-0.975) 5(2.15,-0.975) 6(2.15,-0.325) 7(2.15,0.325) 8(2.15,0.975)
  silkscreen extent -3.62,-1.54 1.5,1.54
SRR1260 [mm] "High Current Inductors"
  rect 2.9x5.4 smd: 1(-5,0) 2(5,0)
  silkscreen extent -6.4,-6.4 6.4,-3.5, body extent -6.25,-6.25 6.25,6.25, height 6.29
TE_2-406549-1 [mm]
  rect 1.398x1.398 hole 0.89: 1(0,0)
  round 1.398 hole 0.89: 2(-1.02,1.78) 3(-2.04,0) 4(-3.06,1.78) 5(-4.08,0) 6(-5.1,1.78) 7(-6.12,0) 8(-7.14,1.78) 9(3.28,6.61) 10(0.99,6.61) 11(-8.15,6.61) 12(-10.44,6.61)
  round 2.355 hole 1.57: S1(-11.71,0.89) S2(4.55,0.89)
  round 3.25 hole 3.25 unplated: ""(-9.93,-2.54) ""(2.77,-2.54)
  silkscreen extent -12.21,-1.37 5.05,7.93, body extent -12.9,-8.76 5.74,7.96, height 14.6
TO-236AB [mm] "SOT-23-3 Leads; Body 3.1 x 3 mm, inc. leads (LxW max)"
  rect 0.8x0.55 smd: 1(-1.15,0.95) 2(-1.15,-0.95) 3(1.15,0)
  silkscreen extent -1.45,-1.55 0.9,1.65, body extent -1.28,-1.5 1.27,1.5, height 1
TO-252AA [mm] "DPAK"
  oct 2x1 smd: 1(-6.75,2.4)
  rect 6x6 smd: 2(0,0)
  rect 2x1 smd: 3(-6.65,-2.2)
  body extent -7.41,-3.26 3.01,3.46, height 2.39
TO-263-3 [mm] "D2PAK"
  rect 4.5x1.25 smd: 1(-6.223,2.54) 3(-6.223,-2.54)
  rect 10.16x9.5 smd: 2(2.921,0)
  silkscreen extent -8.02,-5.21 8.25,5.21, body extent -7.94,-5.05 7.94,4.95, height 4.3
XT60PW_F [mm] "XT 60 Female Right Angle"
  oval 2x3 hole 1 slot 2 at 90 deg: M(-6.75,6) M(6.75,6)
  rect 4x4 hole 2.8: MINUS(3.6,0) PLUS(-3.6,0)
  silkscreen extent -3.6,-1.3 3.6,1.3, body extent -7.75,-2.1 7.75,16.3, height 8.55
XT60PW_M [mm] "XT 60 Male Right Angle"
  oval 2x3 hole 1 slot 2 at 90 deg: M(-6.75,6) M(6.75,6)
  rect 4x4 hole 2.8: MINUS(-3.6,0) PLUS(3.6,0)
  silkscreen extent -3.6,-1.3 3.6,1.3, body extent -7.8,-1.7 7.7,16.5, height 8.4

## Part data
C1 C4 C5 C6 C7 C8 C9 C10 C11 C12 C13 C16 C20 C21 C22 C25 C26 C27 C28 C30 C36 C41 C44 C45 C47 C64 C70 C72: "C - CAPACITOR - MLCC - 1uF - 100V - 1206 - X7R", JLC Availability=Extended, LCSC Part #=C91151, WVDC=100
C15 C23_a C23_b C23_c C23_d C23_e C23_f C23_g C40: "C - CAPACITOR - MLCC - 1uF - 25V - 0402", JLC Availability=Basic, LCSC Part #=C52923, WVDC=16
C17: "C - CAPACITOR - MLCC - 10nF - 50V - 0402", JLC Availability=Basic, LCSC Part #=C15195, WVDC=50
C18 C19: "C - CAPACITOR - MLCC - 1nF - 2000V - 1206 - X7R", JLC Availability=Basic, LCSC Part #=C9196, WVDC=2000
C24: "C - CAPACITOR - MLCC - 3.3nF - 50V - 0402", JLC Availability=Basic, LCSC Part #=C26404, WVDC=50
C38 C42: "C - CAPACITOR - MLCC - 10uF - 6.3V - 0402", JLC Availability=Basic, LCSC Part #=C15525, WVDC=6.3
D1_a D1_b D1_c D1_d D1_e D1_f D2 D2_a D2_b D2_c D2_d D2_e D2_f D3_a D3_b D3_c D3_d D3_e D3_f D4_a D4_b D4_c D4_d D4_e D4_f D7 D9 D12 D13 D14 D15: "D - DIODE - SCHOTTKY - 100V - 2A", JLC Availability=Extended, LCSC Part #=C14996, If=2A, Vrrm=100
D3 D4 D5 D6 D_1A D_1B: "D - DIODE - FAST TRR - 100V - 150mA - 4ns", JLC Availability=Basic, LCSC Part #=C2128, If=150mA, PIV=100V, Trr=4ns
D_1A_G D_1B_G D_CLAMP_1 D_CLAMP_2 D_CLAMP_3 D_CLAMP_4 D_CLAMP_5 D_CLAMP_6 D_CLAMP_7 D_CLAMP_8 D_CLAMP_9 D_CLAMP_10 D_CLAMP_11 D_CLAMP_12 D_CLAMP_13 D_CLAMP_14 D_CLAMP_15 D_CLAMP_16 D_CLAMP_17 D_CLAMP_18: "D - DIODE - ZENER - 5.6V - 500mW", JLC Availability=BASIC, LCSC Part #=C8062
J1 J2: "J - JACK - ETHERNET - Right - THT", JLC Availability=Extended, LCSC Part #=C125068
J_IN: "J - JACK - POWER - XT60 - RIGHT - MALE", JLC Availability=None, LCSC Part #=X
J_OUT: "J - JACK - POWER - XT60 - RIGHT - FEMALE", JLC Availability=None, LCSC Part #=X
L0 L1 L2 L3 L4 L5 L6 L7 L8 L9 L10 L11 L12: "L - INDUCTOR - 220uH - 1.6A - 12.5mm", JLC Availability=Extended, LCSC Part #=C169380, Isat=1.6A
NT2: library part NET_TIE, "R - Net Tie"
Q1 Q2 Q3 Q4: "Q - TRANSISTOR - MOSFET (N) - 250V - 33A - 0.094R", JLC Availability=Extended, LCSC Part #=C33903, WVDC=100
Q_LEDA Q_LEDB Q_LEDVSS: "Q - TRANSISTOR - MOSFET (N) - 60V - 200mW", JLC Availability=Basic, LCSC Part #=C8545, WVDC=60
R1 R10: library part EWSL2512F1L00S9, "R - RESISTOR - SMD - 0.001R - 1% - 2512 - 2W - 50ppm/k", JLC Availability=Extended, LCSC Part #=C349153, Power=2W, ComponentLink1Description=http://riedon.com/media/pdf/CSR.pdf, ComponentLink1URL=http://riedon.com/media/pdf/CSR.pdf
R3 R4 R9 R22 R23: "R - RESISTOR - SMD - 10k - 1% - 0402", JLC Availability=Basic, LCSC Part #=C25744
R5: "R - RESISTOR - SMD - 33k - 1% - 0402", JLC Availability=Basic, LCSC Part #=C25779
R5_a R_1A_c R_1B_c Ron_a Ron_b Ron_c Ron_d: "R - RESISTOR - SMD - 100k - 1% -  0402", JLC Availability=Basic, LCSC Part #=C25741
R11 R14: "R - RESISTOR - SMD - 10R - 1% - 1206", JLC Availability=Basic, LCSC Part #=C17903
R15: "R - RESISTOR - SMD - 3.3k - 1% - 0402", JLC Availability=Basic, LCSC Part #=C25890
R16 R17 R_LEDA_O R_LEDB_O RA1_N RA1_P RB1_N RB1_P: "R - RESISTOR - SMD - 0R - 1% - 0402", JLC Availability=Basic, LCSC Part #=C17168
R18 R18_a R19 R19_a R32 R32_a R33 R33_a: "R - RESISTOR - SMD - 10R - 1% - 0402", JLC Availability=Basic, LCSC Part #=C25077
R100 R101 R102 R103: "R - RESISTOR - SMD - 1k - 1% - 0402", JLC Availability=Basic, LCSC Part #=C11702
R_1A_a R_1A_b R_1B_a R_1B_b: "R - RESISTOR - SMD - 47k - 1% - 0402", JLC Availability=Basic, LCSC Part #=C25792
U: "DC/DC Cntrlr Single-OUT Step Down/Step Up 400kHz Automotive 38-Pin QFN EP T/R", LCSC Part #=C674170, Package="QFN -38 Analog Devices", Availability=Extended, DigiKey-Purchase-URL=https://snapeda.com/shop?store=DigiKey&id=4330144, MF="Analog Devices", MP=LT8705AIUHF#TRPBF, SnapEDA_Link=https://www.snapeda.com/parts/LT8705IUHF%23TRPBF/Analog%20Devices/view-part/4330144/?ref=snap
U1: "U - IC - BUCK CONVERTER, ADJUSTABLE, 95V, 350mA", Package=None, Availability=Unavailable, MP=LM5008MMX/NOPB, Price=None
U5V: "U - IC - 5V Power Regulator", JLC Availability=Basic, LCSC Part #=C58069, VOut=5.0

## Via types
v1: diameter 1, hole 0.6, Top Layer to Bottom Layer, tented both sides, 258 vias
v2: diameter 0.48, hole 0.254, Top Layer to Bottom Layer, tented both sides, 24 vias

## Nets (pads, with @x,y where several pads share a name; then routed paths per layer and width w, separated by ;. In a path a pad name is that pad's centre, name@x,y a point inside that pad or via, vN(x,y) a via of type N, cw(c..) or ccw(c..) an arc to the next point about the centre after c; other vN are vias at no path point)
1A_GATE: D_1A.2 D_1A_G.1 Q_LEDA.1 R_1A_b.2 R_1A_c.2 | length 8.9
  Top Layer w0.2: Q_LEDA.1@38.65,81.65 38.65,81.6 D_1A.2@40.5,81.6 ; D_1A.2@40.5,81.1 R_1A_c.2@44.3,81.1 ; R_1A_b.2@43,83.1 D_1A_G.1@44.5,83.1 D_1A_G.1@44.492,83.092 ; R_1A_c.2@44.292,81.092 R_1A_c.2@44.3,81.1 ; R_1A_c.2@44.5,81.1 R_1A_c.2@44.492,81.1 ; D_1A_G.1@44.5,82.6 44.492,82.608 R_1A_c.2@44.492,81.1 ; R_1A_c.2@44.3,81.1 R_1A_c.2@44.492,81.1
1B_GATE: D_1B.2 D_1B_G.1 R_1B_b.2 R_1B_c.2 | length 8.2
  Top Layer w0.2: D_1B.2@40.5,88.1 R_1B_c.2@44.492,88.1 ; R_1B_b.2@43,86.1 44,86.1 D_1B_G.1@44.492,85.608 ; D_1B_G.1@44.5,85.6 D_1B_G.1@44.492,85.608 ; R_1B_c.2@44.5,88.1 R_1B_c.2@44.492,88.1 ; D_1B_G.1@44.492,85.608 R_1B_c.2@44.492,88.1
10VDC: C23_a.1 C23_b.1 C23_c.1 C23_d.1 C23_e.1 C23_f.1 C23_g.1 C24.2 C40.2 L0.2 R9.1 U5V.1 | length 38.8
  Top Layer w0.2: C23_a.1@210.5,74.5 C23_a.1@210.5,74.508 v1(210.5,76) ; C23_b.1@212,74.5 C23_b.1@212,74.508 212,76 ; C23_c.1@213.5,74.5 C23_c.1@213.5,74.508 213.5,76 ; C40.2@215,74.5 C40.2@215,74.508 215,76 ; C23_d.1@216.5,74.508 216.5,76 ; C23_e.1@218,74.508 218,76 ; L0.2@218.5,88.3 218.8,88.6 ; C23_f.1@219.5,74.508 219.5,76 ; C23_g.1@221,74.508 221,76 ; 222,86.6 222,83.3 231.2,83.3 231.9,84 R9.1@232,84 ; R9.1@232.1,84.192 C24.2@233.2,84.192 C24.2@233.308,84.192
  Top Layer w0.5: U5V.1@222.7,74 222.7,76
  Bottom Layer w0.5: v1(202.5,72) 206.5,76 v1(210.5,76)
+5VDC: C38.2 C42.2 R17.2 R100.1 R101.1 R102.1 R103.1 | length 311.9
  Top Layer w0.2: R101.1@48.4,61.2 48.5,61.2 R101.1@48.5,61.092 v2(48.5,56.6) ; R102.1@48.5,40.592 48.5,36.1 32,36.1 32,56.6 ; R103.1@48.5,54.608 v2(48.5,56.6) ; R100.1@48.5,75.1 R100.1@48.5,75.108 48.5,77 32,77 32,56.6 ; 32,56.6 v2(48.5,56.6)
  Top Layer w0.3: 219.992,67.5 R17.2@219.992,69 C38.2@219.992,70.5 219.992,70.508 C42.2@219.992,72
  Top Layer w0.4: v2(206.5,70.6) 219.9,70.6 C38.2@219.992,70.508
  Bottom Layer w0.4: v2(48.5,56.6) 53.5,61.6 53.5,86.5 189.5,86.5 ; 199.5,86 199.5,70.6 v2(201.7,70.6) v2(206.5,70.6)
A1_N: RA1_P.2 | length 1.5
  Top Layer w0.2: RA1_P.2@212.508,45 214,45
A1_P: RA1_N.2 | length 1.7
  Top Layer w0.2: RA1_N.2@212.508,44 214.2,44
A2_N: RB1_N.2 | length 12.2
  Top Layer w0.2: RB1_N.2@204.8,71.292 RB1_N.2@204.8,70.992 ; RB1_N.2@205,71.2 RB1_N.2@205,71.192 RB1_N.2@204.8,70.992 ; 214.9,69.5 206.5,69.5 204.8,69.5 RB1_N.2@204.8,70.992
A2_P: RB1_P.2 | length 12.6
  Top Layer w0.2: RB1_P.2@204,71.2 RB1_P.2@204,71.192 RB1_P.2@204.2,70.992 ; RB1_P.2@204.2,71.292 RB1_P.2@204.2,70.992 ; 214.2,69 205.5,69 204.2,69 RB1_P.2@204.2,70.992
AGND: NT2.1
GND: C15.2 C21.1 C22.1 C23_a.2 C23_b.2 C23_c.2 C23_d.2 C23_e.2 C23_f.2 C23_g.2 C26.1 C38.1 C40.1 C42.1 C64.1 D2.2 D_1A_G.2 D_1B_G.2 NT2.2 Q_LEDVSS.2 R5_a.1 R15.1 R_1A_c.1 R_1B_c.1 U1.4 U5V.2 | length 192.2
  Top Layer w0.2: v2(37.5,87.6) Q_LEDVSS.2@38.7,87.6 ; R_1A_c.1@45.508,81.1 v2(48.5,81.1) D_1A_G.2@48.5,82.6 ; R_1B_c.1@45.508,88.1 v2(48.5,88.1) D_1B_G.2@48.5,86.6 ; D_1A_G.2@48.5,83.1 D_1B_G.2@48.5,85.6 ; v2(210.5,72.5) C23_a.2@210.5,73.292 ; v2(212,72.5) C23_b.2@212,73.292 ; v2(213.5,72.5) C23_c.2@213.5,73.292 ; v2(215,72.5) C40.1@215,73.292 ; v2(216.5,72.5) C23_d.2@216.5,73.292 ; v2(218,72.5) C23_e.2@218,73.292 ; C23_e.2@218,73.5 C23_f.2@219.492,73.5 ; C23_f.2@219.5,73.5 C23_g.2@220.992,73.5 ; C38.1@221,70.5 C42.1@221,71.992 ; C42.1@221,72 C23_g.2@221,73.492 ; C38.1@221.208,70.5 v2(222,70.5) ; C42.1@221.208,72 v2(222,72) ; D2.2@229,78 229.04,78.12 229.05,78.15 229.07,78.21 229.09,78.27 D2.2@229.1,78.3 ; 230,78.2 230.1,78.2 ; v1@230.392,78.1 v1@230.5,78.1 ; v1@230.8,78.2 v1@230.8,78.8 ; C15.2@231.008,90 v2@231.9,90 ; 231.1,80.3 R5_a.1@231.992,80.3 ; R5_a.1@231.892,80.192 R5_a.1@231.9,80.2 ; 232.4,78.8 232.9,79.3 ; R15.1@233,86.2 R15.1@233.108,86.201 ; R15.1@233.308,86.301 v2@234,86.308
  Bottom Layer w0.2: v2(37.5,87.6) 38,88.1 v2(48.5,88.1)
  Bottom Layer w0.4: v2(210.5,72.5) v2(212,72.5) v2(213.5,72.5) v2(215,72.5) v2(216.5,72.5) v2(218,72.5)
  Bottom Layer w1: v2(48.5,88.1) 54,88.1 54,87.5 192,87.5
  other v1: 228,69.5 232,69.5 230,71.5 228,73.5 232,73.5 230.5,75.5 232,77 230.5,78.5 222,81.5 224,91 226.5,91
  other v2: 234,86.3 231.8,90
GND_IN: D3_a.2 D3_b.2 D3_c.2 D3_d.2 D3_e.2 D3_f.2 D4_a.2 D4_b.2 D4_c.2 D4_d.2 D4_e.2 D4_f.2 D_CLAMP_18.2 | length 2.5
  Top Layer w0.5: 146.5,-7 149,-7
  other v1: 122,-12.5 124,-12.5 126,-12.5 128,-12.5 130,-12.5 132,-12.5 134,-12.5 136,-12.5 138,-12.5 140,-12.5 142,-12.5 144,-12.5 146,-12.5 123,-11 125,-11 127,-11 129,-11 131,-11 133,-11 135,-11 137,-11 139,-11 141,-11 143,-11 145,-11 122,-9.5 124,-9.5 126,-9.5 128,-9.5 130,-9.5 132,-9.5 134,-9.5 136,-9.5 138,-9.5 140,-9.5 142,-9.5 144,-9.5 146,-9.5 123,-8 125,-8 127,-8 129,-8 131,-8 133,-8 135,-8 137,-8 139,-8 141,-8 143,-8 145,-8 58.2,20.5 56.7,21.5 58.2,22.5 56.7,23.5 58.2,24.5 56.7,25.5 58.2,26.5 56.7,27.5 58.2,28.5 56.7,29.5 58.2,30.5 56.7,31.5 58.2,32.5 56.7,33.5 58.2,34.5 56.7,35.5 58.2,36.5 56.7,37.5 58.2,38.5 56.7,39.5 58.2,40.5 56.7,41.5 58.2,42.5 56.7,43.5 58.2,44.5 56.7,45.5 58.2,46.5 56.7,47.5 58.2,66 56.7,67 58.2,68 56.7,69 58.2,70 56.7,71 58.2,72 56.7,73 58.2,74 56.7,75 58.2,76 56.7,77 58.2,78 56.7,79 58.2,80 56.7,81 58.2,82 56.7,83 58.2,84 56.7,85 58.2,86
GND_OUT: J_OUT.MINUS
HO_A: D3.1 R18.1 R18_a.1 | length 8.3
  Top Layer w0.2: D3.1@186.5,64.1 186.5,63.1 189.492,63.1 R18.1@189.5,63.092
  Top Layer w0.4: R18.1@189.4,63.1 189.492,63.1 193.7,63.1
HO_B: D4.1 R19.2 R19_a.2 | length 6.8
  Top Layer w0.2: D4.1@186.5,46.5 186.5,45.5 186.508,45.492 R19_a.2@188,45.492 R19.2@189.5,45.492
  Top Layer w0.4: R19.2@189.5,45.492 189.5,45.5 192.3,45.5
HS_A: C18.2 D12.1 D13.2 L1.1 L2.1 L3.1 L4.1 L5.1 L6.1 L7.1 L8.1 L9.1 L10.1 L11.1 L12.1 Q1.3 Q3.2 R4.1 | length 55.3
  Top Layer w0.2: R4.1@166,76.992 166,75 166,74.8 Q1.3@166.1,74.8
  Top Layer w0.4: 163.5,71 164.1,71 164.1,70.6 ; 164.1,71.2 183.2,71.2 183.2,61.5 193,61.5
  Top Layer w1: 163.5,69.5 D12.1@166.1,69.5 ; 163.5,75 166,75 167.856,75 Q1.3@167.856,74.96 ; 164.2,81.9 164.2,83 167.1,83 D13.2@167.1,85.4
HS_B: C19.2 D7.2 D9.1 L1.2 L2.2 L3.2 L4.2 L5.2 L6.2 L7.2 L8.2 L9.2 L10.2 L11.2 L12.2 Q2.3 Q4.2 R3.2 | length 79.9
  Top Layer w0.2: Q2.3@166,27.5 R3.2@166,29.492
  Top Layer w0.4: 160,55.5 182.5,55.5 183.5,56.5 191.6,56.5
  Top Layer w1: 160.7,27.96 Q2.3@167.856,27.96 ; 162.5,53.9 D9.1@166.6,53.9 D9.1@166.5,54 ; 162.6,38.1 D7.2@167.1,38.1
  Top Layer w1.5: 118,29 133,29 ; 134.5,29 149.5,29
LED_A: J1.9 J2.11 R_LEDB_O.2 | length 50.6
  Top Layer w0.2: v2(34,78.1) R_LEDB_O.2@34,83.1
  Bottom Layer w0.2: v2(34,78.1) 34,56.1 43.5,56.1 ; J2.11@45.915,50.947 43.5,50.947 43.5,56.1 ; J1.9@46,60.1 43.5,60.1 43.5,56.1
LED_B: J1.11 J2.9 R_LEDA_O.2 | length 85.3
  Top Layer w0.2: v2(33,78.6) R_LEDA_O.2@33,83.1
  Bottom Layer w0.2: J2.9@45.915,39.517 45.915,35.1 33,35.1 33,75.7 v2(33,78.6) 44,78.6 44,71.6 J1.11@46,71.6
LED_VSS: Q_LEDA.2 Q_LEDB.2 Q_LEDVSS.3 | length 7.5
  Top Layer w0.2: Q_LEDB.2@35.15,87.55 35.15,87.6 36.5,87.6 Q_LEDVSS.3@36.5,86.6 ; Q_LEDVSS.3@36.35,86.6 36.5,86.45 36.5,83.6 Q_LEDA.2@38.5,83.6
LO_A: D5.1 R32.1 R32_a.1 | length 5.4
  Top Layer w0.2: D5.1@186.5,58.5 186.5,57.5 186.508,57.492 R32_a.1@188,57.492 R32.1@189.5,57.492 190.9,57.492
LO_B: D6.1 R33.2 R33_a.2 | length 6.1
  Top Layer w0.2: D6.1@186.5,49.5 186.5,48.5 R33_a.2@188,48.5 R33.2@189.5,48.5
  Top Layer w0.4: R33.2@189.5,48.5 191.6,48.5